# Altium PCB AS608.PcbDoc
Units mil, origin at the board's own origin, x right, y up, seen from the top; angles counter-clockwise.
Board outline 4665 x 4000 mil, 2 copper layers (Top Layer, Bottom Layer); 29 components, 42 nets, 139 pads, 0 vias.
Unrouted connection lines stored in the file: 79.
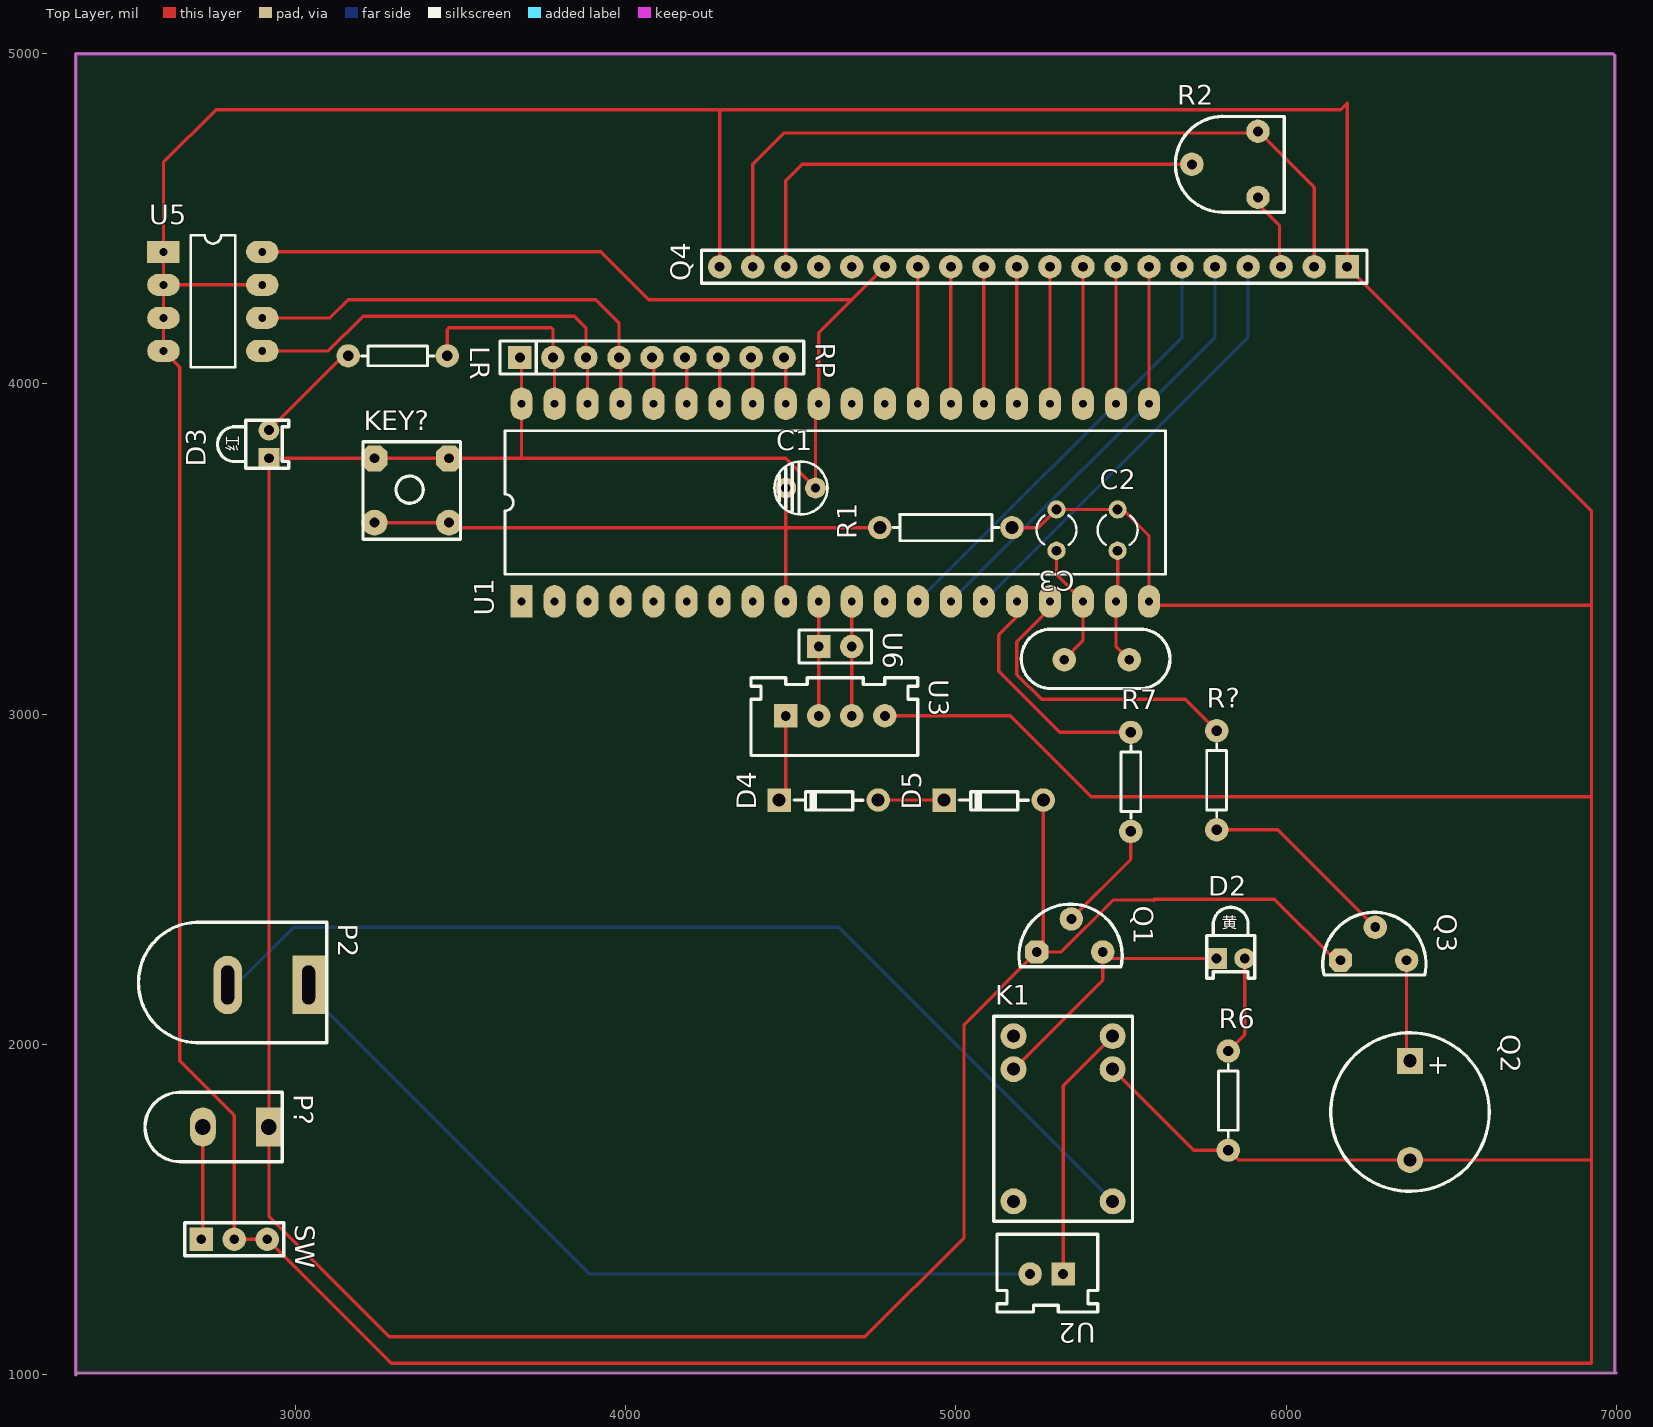
[diagram p0: Top Layer view]
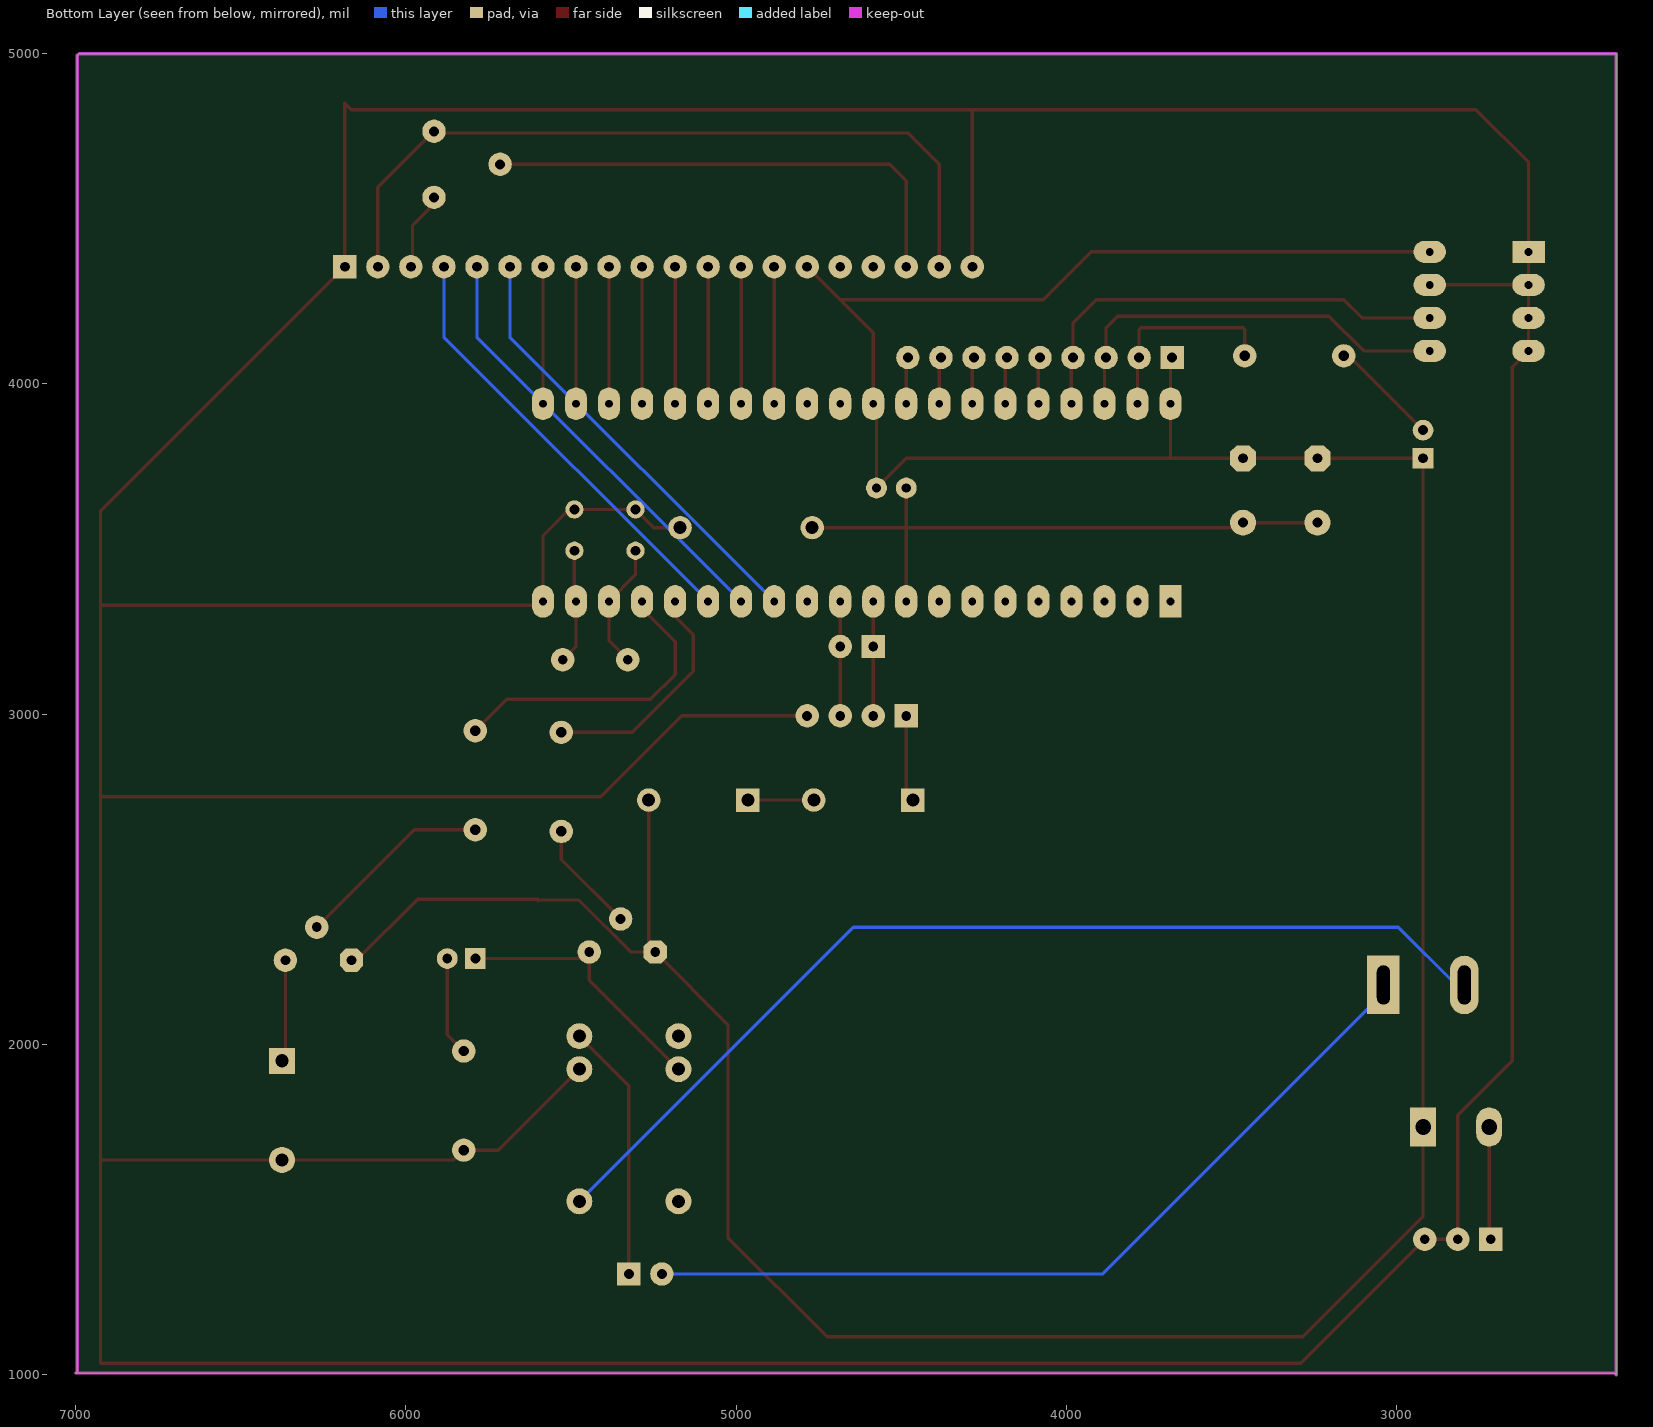
[diagram p1: Bottom Layer view, seen from below]

## Layer stack, top to bottom
Top Solder: solder mask 0.4, Solder Resist, Dk 3.5
Top Layer: signal copper 1.4
Dielectric 1: dielectric 12.6, FR-4, Dk 4.8
Bottom Layer: signal copper 1.4
Bottom Solder: solder mask 0.4, Solder Resist, Dk 3.5

## Board outline
2335,1000 2340,1005 7000,1005 6995,1010 6995,4995 6990,5000 2335,5000

## Design rules (kind name [scope] priority, off if disabled: settings)
Clearance [All] p1: gap=10 ignorepadtopadclearanceinfootprint=FALSE except(0: Arc-Hole Track-Hole SMDPad-Hole THPad-Hole Via-Hole Fill-Hole Poly-Hole Region-Hole Text-Hole)
PolygonConnect [All] p1: connectstyle=Relief reliefconductorwidth=10 reliefentries=4 polygonreliefangle="90 Angle" airgapwidth=10
RoutingVias [All] p1: holewidth=28 width=50 viastyle="Through Hole" minholewidth=28 minwidth=50 maxholewidth=28 maxwidth=50
SolderMaskExpansion [All] p1: expansion=4
Width [All] p1: maxlimit=10 minlimit=10 preferedwidth=10
30 further rules are at their usual default settings.

## Components (designator, comment, footprint, x,y, rotation, side; value= is the part's Value field where it differs from the comment)
C1 "10UF" CD4 4445,3600 r0 top
C2 "30PF" R38 5425,3460 r0 top
C3 "30PF" R38 5370,3655 r180 top
D2 "LED-YELLOW" LED-YELLOW 5755,2195 r0 top
D3 "LED-RED" LED-RED 2985,3740 r90 top
D4 "1N4007" DO-41 4802,2801 r180 top
D5 "1N4007" DO-41 5302,2801 r180 top
K1 "继电器HK4100F" HK4100F 5535,1465 r90 top
KEY? "复位按键" SW 3200,3525 r0 top
LR "1K" AXIAL-0.3 3120,4045 r0 top
P2 "DC-002" DC-005 2520,2000 r0 top
P? "DC-002" DC-002 2595,1510 r0 top
Q1 "S8550" 三极管 5185,2230 r0 top
Q2 "蜂鸣器" 蜂鸣器 6375,1950 r270 top
Q3 "S8550" 三极管 6105,2205 r0 top
Q4 "LCD12864" HDR20 6250,4410 r180 top
R1 "10K" AXIAL-0.4 5205,3610 r180 top
R2 "10K" Res-JT 5660,4515 r0 top
R6 "1K" AXIAL-0.3 5865,1640 r90 top
R7 "1K" AXIAL-0.3 5570,2605 r90 top
R? "1K" AXIAL-0.3 5830,2610 r90 top
RP "10k" R*9 3615,4025 r0 top
SW "双掷开关" SS12D07G5 2660,1355 r0 top
U1 "STC89C52" DIP40 3685,3341.57 r90 top
U2 "接线柱" XH2P 5435,1430 r180 top
U3 "AS608" XH4P 4375,2870 r0 top
U5 "AT24C02" DIP8 2550.79,4045 r0 top
U6 "下载口" HDR2 4520,3150 r0 top
? "crystal" XTAL 5525,3165 r180 top

## Footprints (in the part's own frame and the unit in brackets; to place one, negate y for a bottom-side part, rotate by r counter-clockwise, add the part's x,y. Pads: shape width x height; smd on the part's side, far side on the other; paste and mask are expansions set on the pad)
AXIAL-0.3 [mm]
  round 1.8 hole 0.8: 1(1.016,1.016) 2(8.636,1.016)
  silkscreen extent 2.03,0.25 7.62,1.78
AXIAL-0.4 [mm]
  round 1.8 hole 1: 1(0.889,1.143) 2(11.049,1.143)
  silkscreen extent 1.91,0.13 10.03,2.16
CD4 [mm]
  round 1.6 hole 0.7: 1(3.302,2.159) 2(1.016,2.159)
  silkscreen extent 0.15,0.12 4.23,4.2
DC-002 [mm]
  rect 2x3 hole 1.2: 1(8.255,6.096)
  oval 2x3 hole 1.2: 2(3.175,6.096)
  silkscreen extent -1.27,3.43 9.27,8.76
DC-005 [mm]
  rect 2.5x4.5 hole 1 slot 3 at 90 deg: 1(13.208,4.572)
  oval 2.2x4.5 hole 1 slot 3 at 90 deg: 2(6.985,4.572)
  silkscreen extent 0.12,0.13 14.6,9.4
DIP8 [mm]
  rect 2.5x1.7 hole 0.6: 1(1.27,9.017)
  oval 2.5x1.7 hole 0.6: 2(1.27,6.477) 3(1.27,3.937) 4(1.27,1.397) 5(8.87,1.397) 6(8.87,3.937) 7(8.87,6.477) 8(8.87,9.017)
  silkscreen extent 3.35,0.13 6.79,10.29
DIP40 [mm]
  rect 2.5x1.7 hole 0.6: 1(0,0)
  oval 2.5x1.7 hole 0.6: 2(0,-2.54) 3(0,-5.08) 4(0,-7.62) 5(0,-10.16) 6(0,-12.7) 7(0,-15.24) 8(0,-17.78) 9(0,-20.32) 10(0,-22.86) 11(0,-25.4) 12(0,-27.94) 13(0,-30.48) 14(0,-33.02) 15(0,-35.56) 16(0,-38.1) 17(0,-40.64) 18(0,-43.18) 19(0,-45.72) 20(0,-48.26) 21(15.2,-48.26) 22(15.2,-45.72) 23(15.2,-43.18) 24(15.2,-40.64) 25(15.2,-38.1) 26(15.2,-35.56) 27(15.2,-33.02) 28(15.2,-30.48) 29(15.2,-27.94) 30(15.2,-25.4) 31(15.2,-22.86) 32(15.2,-20.32) 33(15.2,-17.78) 34(15.2,-15.24) 35(15.2,-12.7) 36(15.2,-10.16) 37(15.2,-7.62) 38(15.2,-5.08) 39(15.2,-2.54) 40(15.2,0)
  silkscreen extent 2.08,-49.53 13.12,1.27
DO-41 [mm]
  round 1.8 hole 1: 1(0.94,1.549)
  rect 1.8x1.8 hole 1: 2(8.56,1.549)
  silkscreen extent 2.11,0.81 7.42,2.39
HDR2 [mil]
  rect 70.87x70.87 hole 30: 1(65,55)
  round 70.87 hole 30: 2(165,55)
  silkscreen extent 5,5 225,105
HDR20 [mil]
  rect 70.87x70.87 hole 30: 1(65,55)
  round 70.87 hole 30: 2(165,55) 3(265,55) 4(365,55) 5(465,55) 6(565,55) 7(665,55) 8(765,55) 9(865,55) 10(965,55) 11(1065,55) 12(1165,55) 13(1265,55) 14(1365,55) 15(1465,55) 16(1565,55) 17(1665,55) 18(1765,55) 19(1865,55) 20(1965,55)
  silkscreen extent 5,5 2020,105
HK4100F [mm]
  round 2 hole 1: 1(1.524,9.144) 2(11.684,9.144) 3(14.224,9.144) 4(14.224,1.524) 5(11.684,1.524) 6(1.524,1.524)
  silkscreen extent 0,0 15.75,10.67
LED-RED [mil]
  rect 62.99x62.99 hole 30: 1(35,65)
  round 62.99 hole 30: 2(120,65)
  silkscreen extent 5,5 150,220
LED-YELLOW [mil]
  rect 62.99x62.99 hole 30: 1(35,65)
  round 62.99 hole 30: 2(120,65)
  silkscreen extent 5,5 150,220
R38 [mil]
  round 55.12 hole 30: 1(65,160) 2(65,35)
  silkscreen extent 4,53 126,142
R*9 [mil]
  rect 70.87x70.87 hole 30: 1(65,55)
  round 70.87 hole 30: 2(165,55) 3(265,55) 4(365,55) 5(465,55) 6(565,55) 7(665,55) 8(765,55) 9(865,55)
  silkscreen extent 5,5 925,105
Res-JT [mil]
  round 70.87 hole 30: 1(255,250) 2(255,50) 3(55,150)
  silkscreen extent 5,5 335,295
SS12D07G5 [mil]
  rect 70.87x70.87 hole 30: 1(55,55)
  round 70.87 hole 30: 2(155,55) 2(255,55)
  silkscreen extent 5,5 305,105
SW [mil]
  oct 78.74x78.74 hole 30: 1(40,250) 1(265,250)
  round 78.74 hole 30: 2(40,55) 2(265,55)
  silkscreen extent 5,5 300,300
XH2P [mil]
  rect 70.87x70.87 hole 30: 1(110,125)
  round 70.87 hole 30: 2(210,125)
  silkscreen extent 5,5 310,240
XH4P [mil]
  rect 70.87x70.87 hole 30: 1(110,125)
  round 70.87 hole 30: 2(210,125) 3(310,125) 4(410,125)
  silkscreen extent 5,5 510,240
XTAL [mm]
  round 1.8 hole 0.76: 1(-0.008,-0.001) 2(4.996,-0.001)
  silkscreen extent -3.13,-2.35 8.3,2.22
三极管 [mil]
  oct 70.87x70.87 hole 30: 1(60,50)
  round 70.87 hole 30: 2(165,150) 3(260,50)
  silkscreen extent 6,5 319,195
蜂鸣器 [mm]
  rect 2x2 hole 1.016: 1(-0.009,0.009)
  round 2 hole 1.016: 2(7.611,0.009)
  silkscreen extent -2.17,-6.08 10.02,6.1

## Part data
C1: library part 电解电容
C2 C3: library part 瓷片电容
KEY?: library part 微动开关
LR R1 R6 R7 R?: library part RES
R2: library part 电位器
RP: library part 排阻
?: library part XTAL

## Nets (pads, with @x,y where several pads share a name; then routed paths per layer and width w, separated by ;. In a path a pad name is that pad's centre, name@x,y a point inside that pad or via, vN(x,y) a via of type N, cw(c..) or ccw(c..) an arc to the next point about the centre after c; other vN are vias at no path point)
+5V: P2.1 U2.2
E: Q4.6 U1.13
GND: C2.1 C3.2 K1.5 Q2.2 Q4.1 Q4.20 R1.1 R6.1 SW.2 U1.20 U3.4 U5.1 U5.2 U5.3 U5.4 U5.7
Net_1: ?.1 C2.2 U1.19
Net_2: ?.2 C3.1 U1.18
NetC1_2: C1.2 R1.2
NetD2_1: D2.1 K1.2 Q1.3
NetD2_2: D2.2 R6.2
NetD3_2: D3.2 LR.1
NetD4_1: D4.1 D5.2
NetD4_2: D4.2 U3.1
NetK1_4: K1.4 U2.1
NetK1_6: K1.6 P2.2
NetLR_2: LR.2 RP.2 U1.39
NetP?_2: P?.2 SW.1
NetQ1_2: Q1.2 R7.1
NetQ2_1: Q2.1 Q3.3
NetQ3_2: Q3.2 R?.1
NetQ4_3: Q4.3 R2.2
NetQ4_7: Q4.7 U1.21
NetQ4_8: Q4.8 U1.22
NetQ4_9: Q4.9 U1.23
NetQ4_10: Q4.10 U1.24
NetQ4_11: Q4.11 U1.25
NetQ4_12: Q4.12 U1.26
NetQ4_13: Q4.13 U1.27
NetQ4_14: Q4.14 U1.28
NetQ4_18: Q4.18 R2.3
NetR7_2: R7.2 U1.16
NetR?_2: R?.2 U1.17
NetRP_3: RP.3 U1.38 U5.5
NetRP_4: RP.4 U1.37 U5.6
NetRP_5: RP.5 U1.36
NetRP_6: RP.6 U1.35
NetRP_7: RP.7 U1.34
NetRP_8: RP.8 U1.33
NetRP_9: RP.9 U1.32
NetU1_10: U1.10 U3.2 U6.1
NetU1_11: U1.11 U3.3 U6.2
R/W: Q4.5 U1.14
RS: Q4.4 U1.15
VCC: C1.1 D3.1 D5.1 KEY?.2 P?.1 Q1.1 Q3.1 Q4.2 Q4.15 Q4.19 R2.1 RP.1 U1.31 U1.40 U5.8
pads on no net: K1.1 K1.3 KEY?.1 Q4.16 Q4.17 U1.1 U1.2 U1.3 U1.4 U1.5 U1.6 U1.7 U1.8 U1.9 U1.12 U1.29 U1.30
copper on no net: | length 64034.7
  Top Layer w10: 2715,1410 2720,1415 2720,1750 ; 2900,4100 3100,4100 3205,4205 3845,4205 3880,4170 3880,4080 ; 2900,4200 3105,4200 3160,4255 3910,4255 3980,4185 3980,4080 ; 2900,4300 2600.79,4300 ; 2900,4400 3925,4400 4070,4255 4685,4255 ; 2920,3860 3145,4085 3160,4085 ; 3240,3580 3465,3580 3480,3565 4770,3565 ; 3460,4085 3460,4165 ; 3465,4170 3775,4170 3780,4165 3780,4080 ; 3685,3775 3685,3940 3685,4075 ; 3785,3940 3785,4075 ; 3885,3940 3885,4075 ; 3985,3940 3985,4075 ; 4085,3940 4085,4075 ; 4185,3940 4185,4075 ; 4280,4830 4285,4825 4285,4355 ; 4285,3940 4285,4075 ; 4385,3940 4385,4075 ; 4385,4355 4385,4665 4480,4760 5920,4760 6085,4595 6085,4355 ; 4485,2760 4485,2995 ; 4485,3341.57 4485,3565 4485,3685 ; 4485,3940 4485,4075 ; 4485,4355 4485,4615 4535,4665 5715,4665 ; 4575,3685 4485,3775 3465,3775 3240,3775 2920,3775 2920,1750 2920,1480 3285,1115 4725,1115 5025,1415 5025,2060 5245,2280 ; 4575,3700 4575,3930 4585,3940 4585,4155 4785,4355 ; 4585,2995 4585,3205 4585,3341.57 ; 4685,2995 4685,3205 4685,3341.57 ; 4765,2740 4965,2740 ; 4785,2995 5165,2995 5410,2750 6925,2750 ; 4885,3940 4885,4355 ; 4985,3940 4985,4355 ; 5085,3940 5085,4355 ; 5170,3565 5250,3565 5295,3610 ; 5175,1925 5445,2195 5445,2280 ; 5185,3341.57 5185,3295 5130,3240 5130,3130 5315,2945 5530,2945 ; 5185,3940 5185,4355 ; 5265,2740 5265,2300 5245,2280 ; 5285,3341.57 5285,3320 5185,3220 5185,3120 5260,3045 5695,3045 5790,2950 ; 5285,3940 5285,4355 ; 5305,3495 5305,3421.57 5385,3341.57 5385,3221.71 5328.31,3165.02 ; 5305,3620 5490,3620 5505,3620 5585,3540 5585,3341.57 5596.57,3330 6925,3330 ; 5325,1305 5325,1875 5475,2025 ; 5350,2380 5530,2560 5530,2645 ; 5385,3940 5385,4355 ; 5465,2260 5790,2260 ; 5475,1925 5720,1680 5825,1680 ; 5485,3341.57 5485,3205.34 5525.31,3165.02 ; 5485,3940 5485,4355 ; 5490,3346.57 5490,3495 ; 5585,3940 5585,4355 ; 5600,2435 5600,2440 5965,2440 6150,2255 6165,2255 ; 5600,2437.5 5477.5,2437.5 5320,2280 5245,2280 ; 5790,2650 5975,2650 6270,2355 ; 5825,1980 5875,2030 5875,2260 ; 5915,4565 5915,4545 5980,4480 5980,4360 5985,4355 ; 6365,2255 6365,1960.68 6375.35,1950.34 ; 6920.34,1650.34 6375.35,1650.34 5854.66,1650.34 ; 2600.79,4300 2600.79,4670.79 2760,4830 6165,4830 6185,4850 6185,4355 6925,3615 6925,1035 3290,1035 2915,1410 2815,1410 2815,1785 2650,1950 2650,4050.79 2600.79,4100 2600.79,4300 ; 5825,1680 5854.66,1650.34 ; 5825,1680 5854.66,1650.34 ; 5825,1680 5854.66,1650.34
  Bottom Layer w10: 2795,2180 2820,2180 2995,2355 4275,2355 4645,2355 5475,1525 ; 3040,2180 3040,2155 3890,1305 5225,1305 ; 4885,3341.57 5685,4141.57 5685,4355 ; 4985,3341.57 5785,4141.57 5785,4355 ; 5085,3341.57 5885,4141.57 5885,4355

## Keep-outs
Keep-Out Layer:
  the board outline again, w10

## Text inside footprints (layer, text, board x,y; h text height)
D2: Top Overlay "黄" at 5805,2340 h60
D3: Top Overlay "红" at 2840,3795 h60 r90
Q2: Top Overlay "+" at 6435.35,1970.34 h60 r270